# EAGLE board BR81_MKL_3032_Lichtplatine_V1 (EAGLE 5.10)
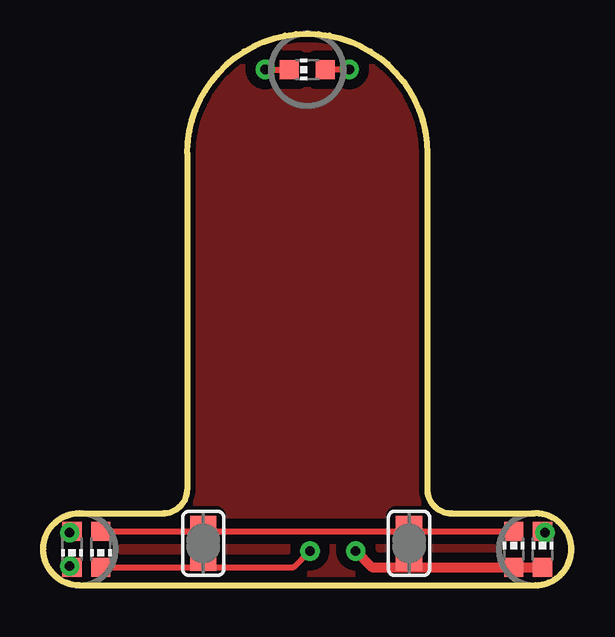
[diagram p0: board, top side]
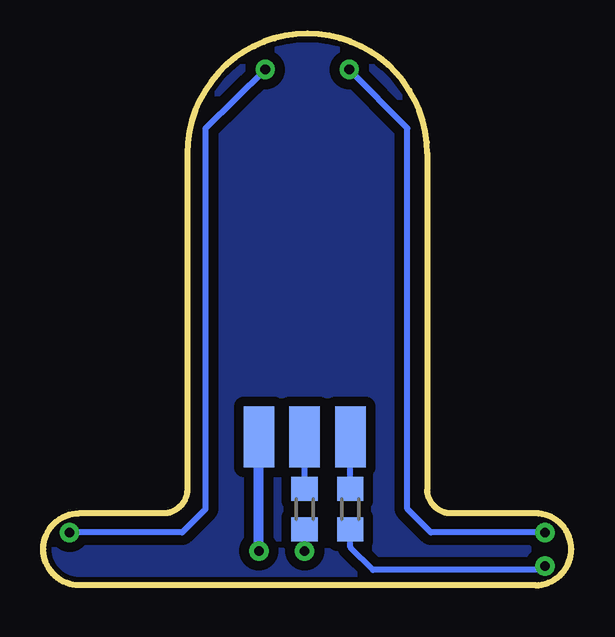
[diagram p1: board, bottom side, seen from below]

No outline drawn. Coordinates in mm, seen from the top.
Copper layers (1*16): Top 0.035mm / dielectric 1.5mm / Bottom 0.035mm
Design rules "default *": minimum track width 7mil, minimum drill 0.6mm, track to track 8mil, track to pad 8mil, pad to pad 8mil, via to via 8mil, smd to smd 8mil, copper to edge 40mil, drill to drill 8mil, minimum pad ring 10mil, minimum via ring 8mil, stop-mask expansion 4mil, vias tented up to drill 0mil, thermal gap 10mil
Milling: 13 lines

## Footprints (pad centres in the part's own frame; a part is rotated, then mirrored left to right if it is on the bottom)
CHIP-LED0603 = smd 0.8 x 0.8: A 0,-0.75; C 0,0.75
SMD1,27-2,54 = smd 1.27 x 2.54: 1 0,0
R0603@1 = smd 1 x 1.1: 1 -0.85,0; 2 0.85,0
SJS = smd 1 x 1.1: 1 -0.65,0; 2 0.65,0

## Placement (x,y rotation side)
AB1  [CHIP-LED0603]  1.2,1.5 180 top
AB2  [CHIP-LED0603]  20.8,1.5 0 top
AB3  [CHIP-LED0603]  11,21.5 90 top
HI  [SMD1,27-2,54]  11.11,6.19 180 bottom
PLUS  [SMD1,27-2,54]  13.02,6.19 180 bottom
R1  1k7  [R0603@1]  9.21,3.17 90 bottom
R2  10k  [R0603@1]  11.11,3.17 90 bottom
RU1  [CHIP-LED0603]  2.4,1.5 180 top
RU2  [CHIP-LED0603]  19.6,1.5 0 top
SJ1  [SJS]  15.24,1.75 90 top
SJ2  [SJS]  6.67,1.75 270 top
VO  [SMD1,27-2,54]  9.21,6.19 180 bottom

## Library data of the parts
AB1-AB3 RU1 RU2 = led
HI PLUS VO = wirepad
R1 R2 = rcl
SJ1 SJ2 = jumper

## Nets
N$1: AB2.C AB3.A
N$2: R1.2 VO.1
N$3: RU1.A RU2.C SJ1.2 SJ2.1
N$4: AB1.A AB3.C
N$5: AB1.C R1.1
N$6: HI.1 R2.2
N$10: AB2.A PLUS.1 RU2.A SJ1.1
N$13: R2.1 RU1.C SJ2.2

## Tracks (layer width: path | path; a pad name or v marks a point on that pad's centre or on a via)
N$1  (via drill 0.4)
  Top 0.254: AB2.C 20.85,2.25 v20.9,2.2 | v12.75,21.5 AB3.A
  Bottom 0.254: v20.9,2.2 16.21,2.2 15.24,3.17 15.24,19.05 v12.75,21.5
N$2
  Bottom 0.254: R1.2 VO.1
N$3
  Top 0.254: RU1.A 6.67,2.25 | 6.67,2.25 15.24,2.25 | 15.24,2.25 RU2.C | 6.67,2.25 SJ2.1 | 15.24,2.25 SJ1.2
N$4  (via drill 0.4)
  Top 0.254: AB1.A 1.14,2.25 1.1,2.21 v1.1,2.2 | v9.25,21.5 AB3.C
  Bottom 0.254: v1.1,2.2 5.85,2.2 6.83,3.17 6.83,19.05 v9.25,21.5
N$5  (via drill 0.4)
  Top 0.254: AB1.C 1.15,0.75 v1.1,0.8
  Bottom 0.254: v1.1,0.8 1.26,0.64 8.26,0.64 9.21,1.59 R1.1
N$6
  Bottom 0.254: R2.2 HI.1 | HI.1
N$7
  pour Top (isolate 0.406): 1.5,2.5 arc90 0.5,1.5 arc90
  pour Bottom (isolate 0.406): 1.5,2.5 arc90 0.5,1.5 arc90
N$8
  pour Bottom (isolate 0.406): 15.5,18 arc90 11,22.5 arc90 6.5,18 6.5,4 arc-90 5,2.5 1.5,2.5 arc90 0.5,1.5 arc90 1.5,0.5 20.5,0.5 arc90 21.5,1.5 arc90 20.5,2.5 17,2.5 arc-90 15.5,4
  pour Top (isolate 0.406): 15.5,18 arc90 11,22.5 arc90 6.5,18 6.5,4 arc-90 5,2.5 1.5,2.5 arc90 0.5,1.5 arc90 1.5,0.5 20.5,0.5 arc90 21.5,1.5 arc90 20.5,2.5 17,2.5 arc-90 15.5,4
N$10  (via drill 0.4)
  Top 0.254: AB2.A 20.95,0.91 20.95,0.95 | 15.24,0.75 SJ1.1
  Top 0.406: AB2.A RU2.A 15.24,0.75 13.7,0.75 v13.02,1.43
  Bottom 0.406: v13.02,1.43 PLUS.1
N$13  (via drill 0.4)
  Top 0.254: RU1.C 6.67,0.75 | 6.67,0.75 10.43,0.75 v11.11,1.43 | SJ2.2 | 6.67,0.75 SJ2.2
  Bottom 0.254: v11.11,1.43 R2.1 | R2.1

## Text on the board
tStop: BR81 LED | Für Märklin 3032(1) | design by Janik Merz
bStop: BR81 LED | vo | hi | +